# Altium PCB Switch PCB.PcbDoc
Units mil, origin at the board's own origin, x right, y up, seen from the top; angles counter-clockwise.
Board outline 5130 x 1650 mil, 2 copper layers (Top Layer, Bottom Layer); 19 components, 13 nets, 59 pads, 13 vias.
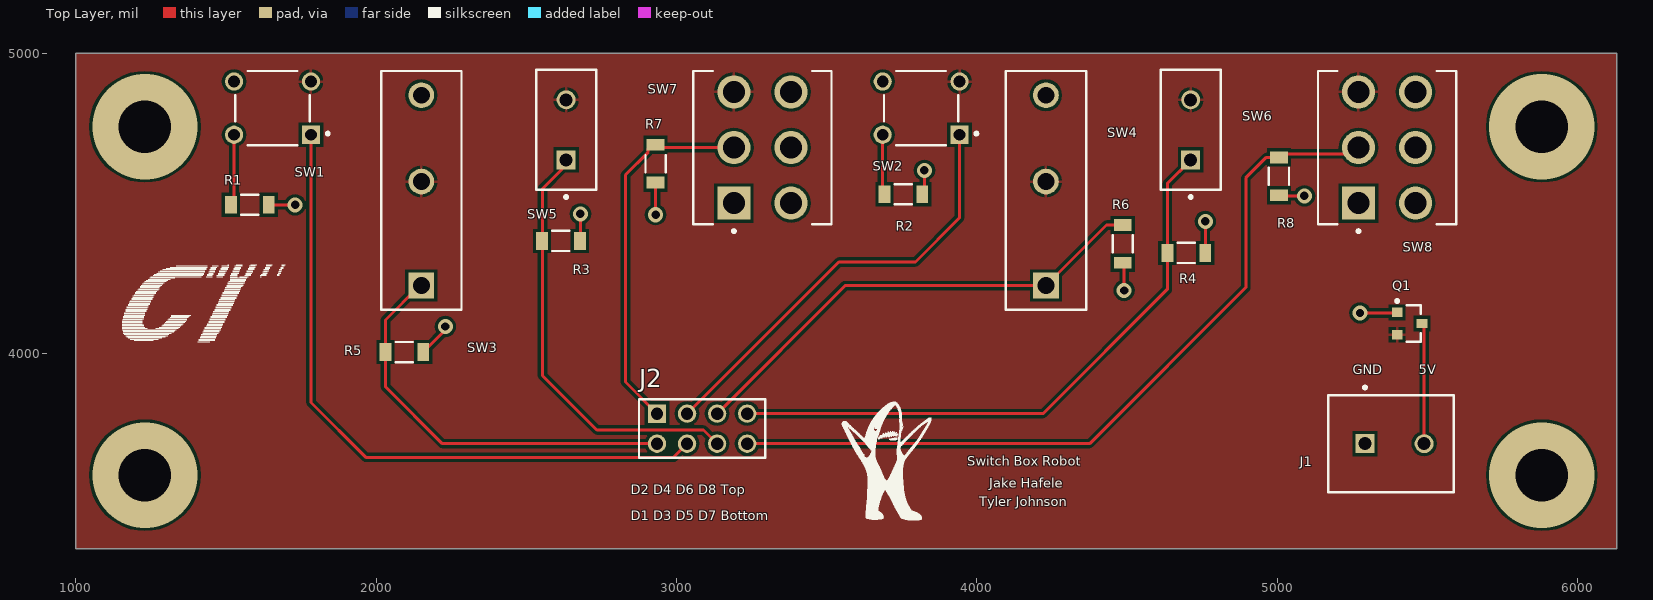
[diagram p0: Top Layer view]
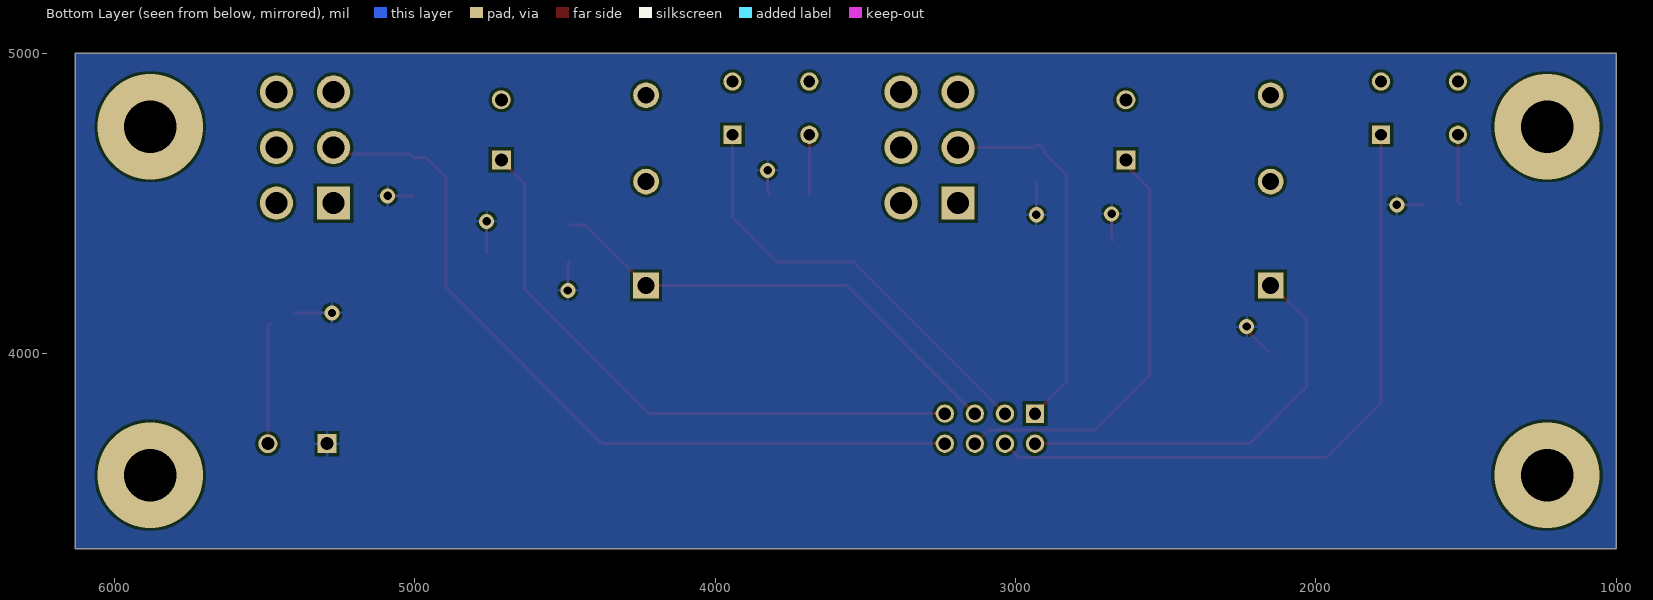
[diagram p1: Bottom Layer view, seen from below]
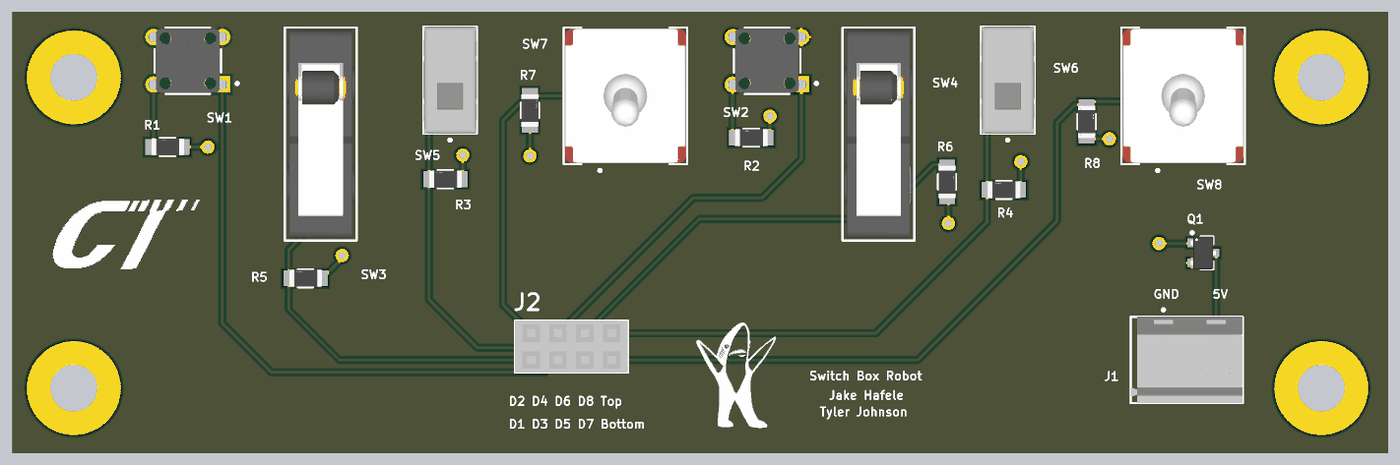
[diagram p2: 3D render of the assembled board from above, using the file's embedded part models]

## Layer stack, top to bottom
Top Solder: solder mask 0.4, Solder Resist, Dk 3.5
Top Layer: signal copper 1.4
Dielectric 1: dielectric 12.6, FR-4, Dk 4.8
Bottom Layer: signal copper 1.4
Bottom Solder: solder mask 0.4, Solder Resist, Dk 3.5

## Board outline
1000,3350 6130,3350 6130,5000 1000,5000

## Design rules (kind name [scope] priority, off if disabled: settings)
Clearance [All] p1: gap=10 ignorepadtopadclearanceinfootprint=FALSE except(0: Arc-Hole Track-Hole SMDPad-Hole THPad-Hole Via-Hole Fill-Hole Poly-Hole Region-Hole Text-Hole)
PolygonConnect [All] p1: connectstyle=Relief reliefconductorwidth=10 reliefentries=4 polygonreliefangle="90 Angle" airgapwidth=10
RoutingVias [All] p1: holewidth=28 width=50 viastyle="Through Hole" minholewidth=28 minwidth=50 maxholewidth=28 maxwidth=50
SolderMaskExpansion [All] p1: expansion=4 istentingtop=FALSE
Width [All] p1: maxlimit=10 minlimit=10 preferedwidth=10
30 further rules are at their usual default settings.

## Components (designator, comment, footprint, x,y, rotation, side; value= is the part's Value field where it differs from the comment)
J1 "282836-2" TECO-282836-2_V 5390,3700 r0 top
J2 "Switch Connector" SMTC-SSW-104-01-X-D 2935,3800 r0 top
Q1 "SSM3J328R,LF" TOSH-SOT-23F_V 5440,4100 r0 top
R1 "10k" FP-RT1206-MFG 1579.41,4495 r180 top value=10KΩ
R2 "10k" FP-RT1206-MFG 3755,4530 r180 top value=10KΩ
R3 "10k" FP-RT1206-MFG 2615,4375 r180 top value=10KΩ
R4 "10k" FP-RT1206-MFG 4696.61,4335 r180 top value=10KΩ
R5 "10k" FP-RT1206-MFG 2093.82,4005 r180 top value=10KΩ
R6 "10k" FP-RT1206-MFG 4485,4365 r90 top value=10KΩ
R7 "10k" FP-RT1206-MFG 2930,4632.01 r90 top value=10KΩ
R8 "10k" FP-RT1206-MFG 5005,4590 r90 top value=10KΩ
SW1 "Button" FP-1825910-2-0#1 1655,4816.89 r180 top
SW2 "Button" FP-1825910-2-0#2 3814.05,4816.89 r180 top
SW3 "Tactile" FP-SS-5GL2D-MFG 2150.35,4543.07 r90 top
SW4 "Tactile" FP-SS-5GL2D-MFG 4229.41,4543.07 r90 top
SW5 "Slide" CKCP-TS02CBE_V 2632.32,4744.65 r90 top
SW6 "Slide" CKCP-TS02CBE_V 4711.38,4744.65 r90 top
SW7 "Toggle" FP-100DP1T2B3M2QEH-MFG 3285.94,4685.79 r90 top
SW8 "Toggle" FP-100DP1T2B3M2QEH-MFG 5365,4685.79 r90 top

## Footprints (in the part's own frame and the unit in brackets; to place one, negate y for a bottom-side part, rotate by r counter-clockwise, add the part's x,y. Pads: shape width x height; smd on the part's side, far side on the other; paste and mask are expansions set on the pad)
CKCP-TS02CBE_V [mm] "THD, 2-Leads, Body 10.16x5.08mm"
  rect 1.6x1.6 hole 1.09: 1(-2.54,0)
  round 1.6 hole 1.09: 3(2.54,0)
  silkscreen extent -5.8,-2.54 5.08,2.54, body extent -5.08,-2.54 5.08,2.54, height 12.93
FP-100DP1T2B3M2QEH-MFG [mm]
  rect 2.8x2.8 hole 1.85: 1(-4.7,2.415)
  round 2.8 hole 1.85: 2(0,2.415) 3(4.7,2.415) 4(-4.7,-2.415) 5(0,-2.415) 6(4.7,-2.415)
  silkscreen extent -7.2,-5.84 6.48,5.84, body extent -6.58,-5.94 6.58,5.94, height 0.25
FP-1825910-2-0#1 [mm]
  rect 1.54x1.54 hole 0.99 paste-1000 mask+0: 1(-3.25,2.25)
  round 1.54 hole 0.99 paste-1000 mask+0: 2(3.25,2.25) 3(-3.25,-2.25) 4(3.25,-2.25)
  silkscreen extent -4.8,-3.15 3.15,3.15, body extent -4.12,-3.24 4.12,3.24, height 0.25
FP-1825910-2-0#2 [mm]
  rect 1.54x1.54 hole 0.99: 1(-3.25,2.25)
  round 1.54 hole 0.99: 2(3.25,2.25) 3(-3.25,-2.25) 4(3.25,-2.25)
  silkscreen extent -4.8,-3.15 3.15,3.15, body extent -4.12,-3.24 4.12,3.24, height 0.25
FP-RT1206-MFG [mm]
  rect 1x1.5 smd: 1(-1.6,0) 2(1.6,0)
  silkscreen extent -0.72,-0.85 0.72,0.85, body extent -2.2,-0.95 2.2,0.95, height 0.25
FP-SS-5GL2D-MFG [mm]
  rect 2.175x2.175 hole 1.425: 1(-8.05,0)
  round 2.175 hole 1.425: 2(0.75,0) 3(8.05,0)
  silkscreen extent -10.1,-3.4 10.1,3.4, body extent -10.2,-3.5 10.2,3.5, height 0.25
SMTC-SSW-104-01-X-D [mm] "SQ Post Socket, 2x4 Pins, Vertical, 2.54mm Pitch, Female"
  rect 1.55x1.55 hole 1.04: 1(0,0)
  round 1.55 hole 1.04: 2(0,-2.54) 3(2.54,0) 4(2.54,-2.54) 5(5.08,0) 6(5.08,-2.54) 7(7.62,0) 8(7.62,-2.54)
  silkscreen extent -1.53,-3.74 9.15,1.2, body extent -1.52,-3.75 9.14,1.21, height 8.51
TECO-282836-2_V [mm] "Female Header, Pitch 5mm, 1 x 2 Position, Height 10mm"
  rect 1.6x1.6 hole 1.1: 1(-2.5,0)
  round 1.6 hole 1.1: 2(2.5,0)
  silkscreen extent -5.6,-4.1 5,4.87, body extent -5.6,-4.1 5,4.1, height 10
TOSH-SOT-23F_V [mm] "SOTFL, 3-Leads, Body 3.1x1.9mm, Pitch 0.95mm"
  rect 0.9x0.8 smd: 1(-1.05,0.95) 2(-1.05,-0.95) 3(1.05,0)
  silkscreen extent -1.17,-1.55 0.95,2.02, body extent -1.2,-1.55 1.2,1.55, height 0.88

## Part data
J1: library part CMP-1684-00017-1, "Female Header, Pitch 5 mm, 1 x 2 Position, Height 10 mm, Tail Length 3.5 mm, Rohs, Bulk", Color=Green, Current=13.5A, Manufacturer="TE Connectivity", Package Description="Female Header, Pitch 5 mm, 1 x 2 Position, Height 10 mm, Tail Length 3.5 mm", Package Reference=THD, Standard Package=300, Voltage=300V, 3D Model=282836-2.pdf, Category=Connectors,Interconnects, Clamp Material - Plating=Brass-NickelPlated, Contact Material - Plating=Brass-TinPlated, Datasheet URL=http://www.te.com.cn/commerce/DocumentDelivery/DDEController?Action=showdoc&DocId=Catalog+Section%7F1308389_EUROSTYLE_TERMINAL_BLOCKS%7F0607%7Fpdf%7FEnglish%7FENG_CS_1308389_EUROSTYLE_TERMINAL_BLOCKS_0607.pdf%7F282836-2, Dynamic Catalog=BuchananSeries, Family=TerminalBlocks-WiretoBoard, Featured Product=EurostyleTerminalBlockConnectors, Features=Interlocking(Side), Housing Material=Polyamide(PA66),Nylon6/6, Manufacturer URL=http://www.te.com, Mating Orientation=HorizontalwithBoard, Mounting Type=ThroughHole, Number of Levels=1, Other Names="5ULV-02B / A98076", Packaging=Bulk, Pitch="0.197\"(5.00mm)", Positions Per Level=2, Product Training Modules=Wire-to-BoardEurostyleTerminalBlocks, RoHS Information=282836-2StatementofCompliance, Screw Material - Plating=Brass-NickelPlated, Screw Thread=M3, Series=Buchanan, Torque - Screw=0.68Nm(6Lb-In), Wire Gauge=16-30AWG, Wire Termination=Screw-RisingCageClamp
J2: library part CMP-1023-00339-1, "SQ Post Socket, Through-hole, Vertical, -55 to 105 degC, 2.54mm Pitch, 8-Pin, Female, RoHS", Manufacturer=Samtec, PartNumber=SSW-104-01-T-D, Temperature Range="-55 to 105 degC", ComponentLink1Description="Manufacturer URL", ComponentLink1URL=http://www.samtec.com, ComponentLink2Description=Datasheet, ComponentLink2URL=http://www.samtec.com/documents/webfiles/pdf/SSW_TH.PDF, ComponentLink3Description="Package Specification", ComponentLink3URL=http://www.samtec.com/documents/webfiles/cpdf/SSW-1XX-XX-XXX-X-XX-XXX-XX-MKT.pdf, DatasheetVersion=F-214, Mounting Technology=Through-hole, Orientation=Vertical, PackageDescription="Assembly, Socket Strip .016 X .031 Tail", PackageReference=SSW-104-01-X-D, PackageVersion="CA, 6/1987", Pitch="2.54 mm", RoHS=True
Q1: library part CMP-2100-03686-1, "TOSHIBA Field-Effect Transistor Silicon P-Channel MOS Type (U-MOS VI), 20 V, -55 to 125 degC, 3-Pin SOTFL, RoHS, Tape and Reel", Case/Package=SOT-23-3, Continuous Drain Current (ID)=6A, Drain to Source Breakdown Voltage=-20V, Drain to Source Resistance=47.4mOhm, Drain to Source Voltage (Vdss)=20V, Gate to Source Voltage (Vgs)=8V, Input Capacitance=840pF, Manufacturer=Toshiba, Max Operating Temperature=150degC, Max Power Dissipation=1W, Min Operating Temperature=-55degC, Package Description="3-Pin Small Outline Transistor, Flat Lead, Body 2.9 x 1.8 mm, Pitch 0.95 mm", Package Quantity=3000, Package Reference=SOT-23F, Power Dissipation=2W, Datasheet URL=https://toshiba.semicon-storage.com/info/docget.jsp?did=2429&prodName=SSM3J328R, Datasheet Version=41699.0, Element Configuration=Single, Manufacturer URL=http://www.toshiba.com/, Mount=SurfaceMount, Number Of Channels=1, Number of Elements=1, Number of Pins=3, Package URL=https://toshiba.semicon-storage.com/ap-en/design-support/package/detail.SOT-23F.html, Packaging=TapeandReel, Radiation Hardening=No, Rds On Max=29.8mOhm, RoHSCompliant=true, Turn-Off Delay Time=107ns, Turn-On Delay Time=32ns
R1 R2 R3 R4 R5 R6 R7 R8: library part CMP-2003-04268-2, "RES SMD 10K OHM 0.5% 1/4W 1206", Manufacturer=Yageo, Manufacturer Part Number=RT1206DRE0710KL, Package=RT1206, Power Rating=0.25W, Resistance=10KΩ, Temperature="-55°C to +155°C", Temperature Coefficient="50 ppm/°C", Temperature Range High=+155°C, Temperature Range Low=-55°C, Tolerance=0.0001, Voltage Rating=200V, Automotive=No, Category=Res, ComponentLink2Description=Datasheet, ComponentLink2URL=http://www.yageo.com/documents/recent/PYu-RT_1-to-0.01_RoHS_L_9.pdf, Composition="Thin Film", Device Class L1="Passive Components", Device Class L2=Resistors, Device Class L3="Chip SMD Resistors", Digikey Description="RES SMD 10K OHM 0.5% 1/4W 1206", Footprint Url=http://www.yageo.com/exep/pages/download/literatures/PYu-R_Mount_10.pdf, Height=0.65mm, Ipc Land Pattern Name=RESC310160X55, Lead Free=Yes, Octopart=https://octopart.com/rt1206dre0710kl-yageo-1219301, RoHS=TRUE, Series=RT
SW1 SW2: library part CMP-03407-000004-1, "SWITCH TACTILE SPST-NO 0.05A 24V. Push button", Contact Current Rating=50mA, Contact Resistance=100mΩ, Manufacturer=TE, Manufacturer Part Number=1825910-2, Operating Force=160gf, Package=0, Temperature="-35°C to +85°C", Temperature Range High=+85°C, Temperature Range Low=-35°C, Voltage Rating Dc=24V, Automotive=No, Category=Switch, ComponentLink2Description=Datasheet, ComponentLink2URL=https://www.te.com/commerce/DocumentDelivery/DDEController?Action=showdoc&DocId=Customer+Drawing%7F1825910%7FC10%7Fpdf%7FEnglish%7FENG_CD_1825910_C10.pdf%7F1825910-2, Device Class L1=Electromechanical, Device Class L2=Switches, Device Class L3="Tactile Switches", Digikey Description="SWITCH TACTILE SPST-NO 0.05A 24V", Electromechanical Life=100000Cycles, Height=4.6mm, Lead Free=Yes, Mount="Through Hole", Octopart=https://octopart.com/1825910-2-te+connectivity-42270502, RoHS=TRUE, Throw Configuration=SPST-NO
SW3 SW4: library part CMP-08833-000010-1, "SWITCH SNAP ACTION SPDT 5A 125V. Snap Action", Contact Current Rating=5A, Max Operating Temperature=85°C, Max Voltage Rating (AC)=125V, Max Voltage Rating (DC)=14V, Min Operating Temperature=-25°C, Operating Force=0.49N, Operating Position=0.571inch, Package Quantity=500, Ratings=IP40, Voltage Rating (DC)=30V, Actuator Material="Stainless Steel", Contact Material=Silver, Current Rating=5A, Depth=6.4mm, Differential Travel=0.031inch, Electrical Life=200000Cycles, Lead Free="Lead Free", Length=19.8mm, Max Current Rating=5A, Mechanical Life=30000000Cycles, Mount="Through Hole", Orientation=Straight, Overtravel=0.047inch, Packaging=Bulk, REACH SVHC="No SVHC", Switch Function=On-Mom, Termination="PC Pins", Throw Configuration=SPDT, Voltage Rating (AC)=125V
SW5 SW6: library part CMP-2000-07317-1, "Tiny Slide Switch, SPST, 20 V, -30 to 85 degC, 2-Pin THD, RoHS, Bulk Slide Switch", AC Voltage Rating (Max)=20V, Manufacturer="C&K Components", Operating Temp Range=-30Cto85C, Package Description="2-Pin Through Hole Device, Body 10.16 x 5.08 mm", Package Reference=TS02CBE, Actuator Material=Nylon, Actuator Style=TopSlide, Contact Material=CopperAlloy, Contact Plating=Gold/Nickel, Datasheet URL=http://www.ck-components.com/media/1426/ts_12feb16.pdf, Datasheet Version=02/2016, DC Voltage Rating (Max)=20V, Housing Material=N/A/StainlessSteel, Manufacturer URL=http://www.ckswitches.com/, Mounting Style=ThroughHole, Mounting Technology=ThroughHole, Pole Throw Configuration=SPST, Product Depth (mm)=5.08mm, Product Height (mm)=12.91mm, Product Length (mm)=10.16mm, Switch Configuration=OFFNoneON, Terminal Type=PCPins, Type=Tiny
SW7 SW8: library part CMP-17880-000002-1, "SWITCH TOGGLE NON ILLUMINATED. Double Pole Single Throw", Contact Current Rating=5A, Contact Resistance=10mΩ, Manufacturer=E-Switch, Manufacturer Part Number=100DP1T2B3M2QEH, Package=0, Temperature="-30°C to +85°C", Temperature Range High=+85°C, Temperature Range Low=-30°C, Voltage Rating Ac=120V, Voltage Rating Dc=28V, Automotive=No, Category=Switch, ComponentLink2Description=Datasheet, ComponentLink2URL=http://spec_sheets.e-switch.com/specs/ST121094.pdf, Device Class L1=Electromechanical, Device Class L2=Switches, Device Class L3="Toggle Switches", Digikey Description="SWITCH TOGGLE NON ILLUMINATED", Electromechanical Life=40000Cycles, Footprint Url=http://spec_sheets.e-switch.com/specs/ST121094.pdf, Height=23.6mm, Lead Free=Yes, Mount="Through Hole", Mouser Description="Toggle Switches 5A 120VAC/28VDC On-None-On PC Mnt", Octopart=https://octopart.com/100dp1t2b3m2qeh-e-switch-7054946, RoHS=TRUE, Throw Configuration=DPDT

## Via types
v1: diameter 50, hole 28, Top Layer to Bottom Layer, 9 vias
v2: diameter 350, hole 175, Top Layer to Bottom Layer, 4 vias

## Nets (pads, with @x,y where several pads share a name; then routed paths per layer and width w, separated by ;. In a path a pad name is that pad's centre, name@x,y a point inside that pad or via, vN(x,y) a via of type N, cw(c..) or ccw(c..) an arc to the next point about the centre after c; other vN are vias at no path point)
+5: Q1.2 SW1.3 SW2.3 SW3.2 SW4.2 SW5.3 SW6.3 SW7.3 SW8.3
\: J2.7 R4.2 SW6.1 | length 2030
  Top Layer w10: J2.7 4220,3800 4633.62,4213.62 R4.2 4633.62,4565.67 SW6.1@4710,4642.05
D1: J2.2 R5.2 SW3.1 | length 1366.8
  Top Layer w10: SW3.1@2145,4226.14 2030.83,4111.97 R5.2 2030.83,3889.17 2220,3700 J2.2
D2: J2.1 R7.2 SW7.2 | length 1250.4
  Top Layer w10: J2.1 2830,3905 2830,4595 2905.47,4670.47 2905.47,4680.31 2920.16,4695 R7.2 2939.21,4685.79 SW7.2
D3: J2.4 SW1.1 | length 2237.8
  Top Layer w10: SW1.1 1782.95,3837.05 1965.51,3654.49 2989.49,3654.49 J2.4
D4: J2.3 SW2.1 | length 1453.4
  Top Layer w10: J2.3 3540,4305 3795,4305 3942.01,4452.01 SW2.1
D5: J2.6 R3.2 SW5.1 | length 1405.4
  Top Layer w10: SW5.1@2630,4625 2553.62,4548.62 2553.62,3926.38 2734.49,3745.51 3089.49,3745.51 J2.6
D6: J2.5 R6.2 SW4.1 | length 1610.1
  Top Layer w10: J2.5 3561.14,4226.14 SW4.1 4369.25,4365.98 4431.26,4427.99 R6.2
D7: J2.8 R8.2 SW8.2 | length 2657.1
  Top Layer w10: J2.8 4375,3700 4895,4220 4895,4585 4962.99,4652.99 R8.2 5017.01,4665 5222.01,4665 5242.8,4685.79 SW8.2
GND: J1.1 Q1.1 R1.1 R2.1 R3.1 R4.1 R5.1 R6.1 R7.1 R8.1 | length 905
  Top Layer w10: R1.1 1647.4,4500 1652.4,4495 v1(1730,4495) ; R5.1 2230,4078.19 v1(2230,4090) ; R3.1 2673.39,4379.61 2680,4386.22 v1(2680,4465) ; v1(2930,4462.01) R7.1 ; R2.1 3825,4537.01 v1(3825,4610) ; R6.1 4486.81,4303.82 4490,4300.63 v1(4490,4210) ; R4.1 4760,4335.39 v1(4760,4440) ; R8.1 5007.01,4525 v1(5090,4525) ; v1(5275,4135) 5396.26,4135 Q1.1
NetJ1_2: J1.2 Q1.3 | length 404.8
  Top Layer w10: Q1.3@5480,4101.34 Q1.3 5488.43,4092.91 J1.2
NetR1_2: R1.2 SW1.2 | length 237.7
  Top Layer w10: R1.2 1527.05,4505.63 SW1.2
NetR2_2: R2.2 SW2.2 | length 174.7
  Top Layer w10: R2.2@3685,4530 SW2.2@3685,4704.73
pads on no net: SW1.4 SW2.4 SW3.3 SW4.3 SW7.1 SW7.4 SW7.5 SW7.6 SW8.1 SW8.4 SW8.5 SW8.6
copper on no net:
  other v2: 1230,3595 5880,3595 1230,4755 5880,4755

## Polygon pours and split planes (outlines as drawn)
GND on Bottom Layer "GND_L02_P001" (solid, pour order 1): 997.93,5000 6130,5000 6130,3350 1000,3350
+5 on Top Layer "+5_L01_P000" (solid, pour order 0): 1000,5000 6130,5000 6130,3350 1000,3350

## Silkscreen, mask and mechanical layers (free items; w line width, h text height)
Top Overlay:
  drawing of 2982 lines, arcs and shapes, not listed
  text "GND" at 5250.91,3930.91 h31.5
  text "5V" at 5470.91,3930.91 h31.5
  text "Switch Box Robot" at 3967.48,3625.91 h31.5
  text "Jake Hafele" at 4040.95,3553.41 h31.5
  text "D2 D4 D6 D8 Top" at 2847.19,3531.4 h31.5
  text "Tyler Johnson" at 4006.84,3491.4 h31.5
  text "D1 D3 D5 D7 Bottom" at 2847.19,3445.91 h31.5
Mechanical 1:
  the board outline again, w10